# Altium PCB B229.PcbDoc
Units mm, origin at the board's own origin, x right, y up, seen from the top; angles counter-clockwise.
Board outline 22 x 40 mm, 4 copper layers (Top, Layer 1, Layer 2, Bottom), stack 1.564 mm thick; 28 components, 32 nets, 138 pads, 138 vias.
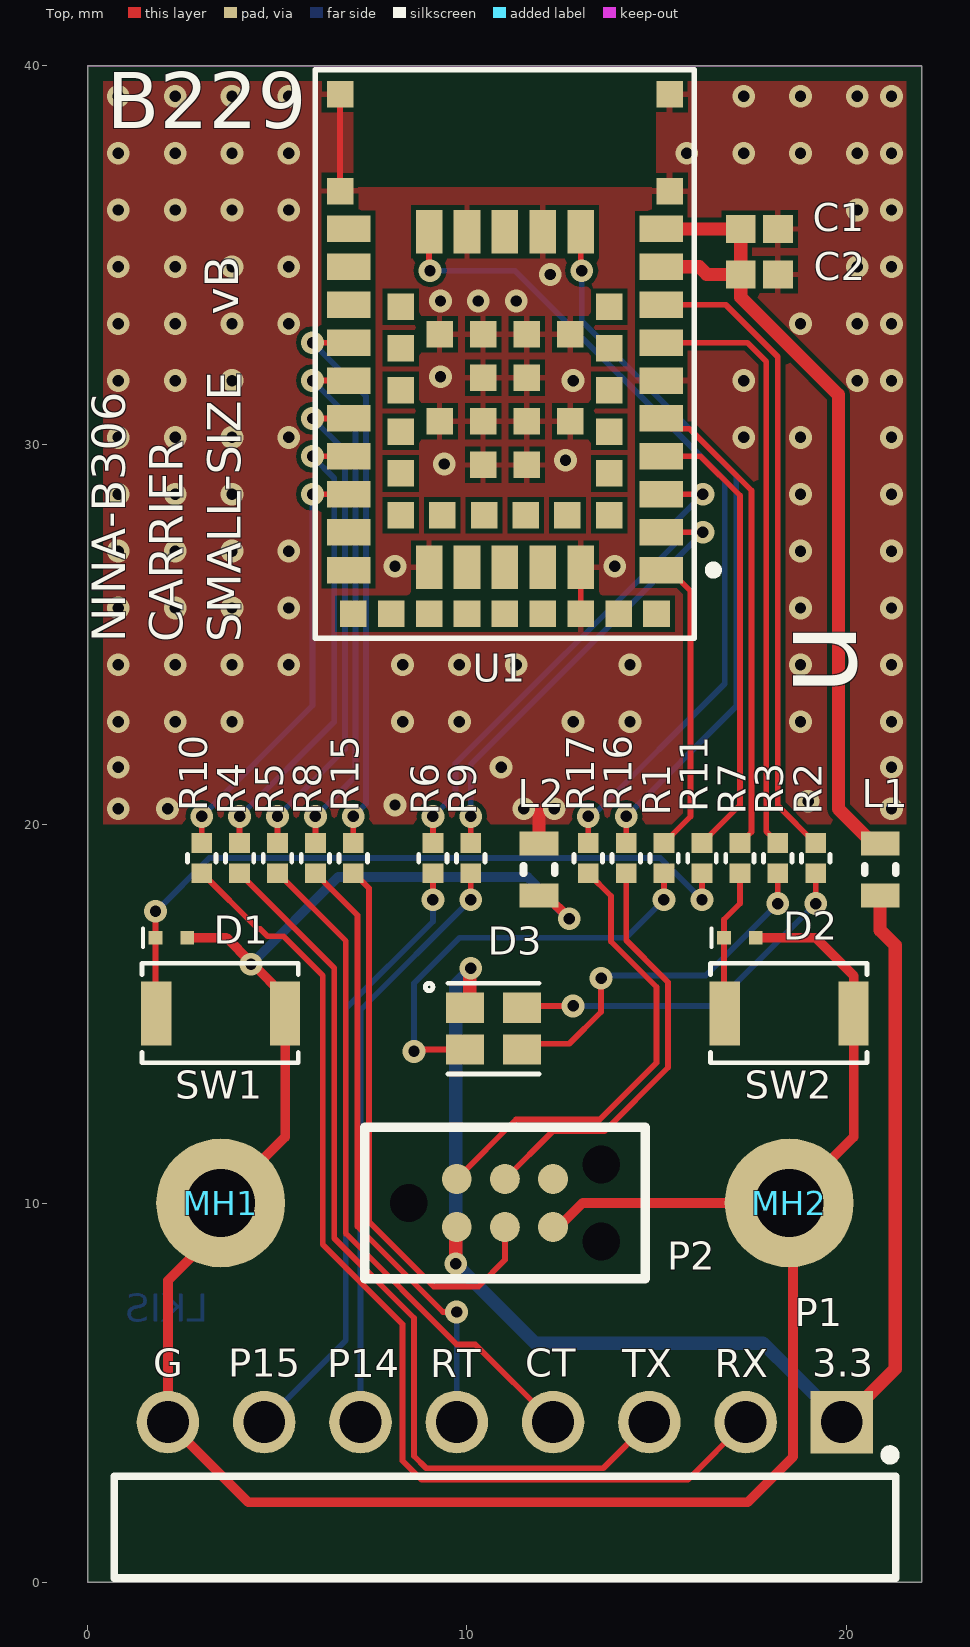
[diagram p0: Top view]
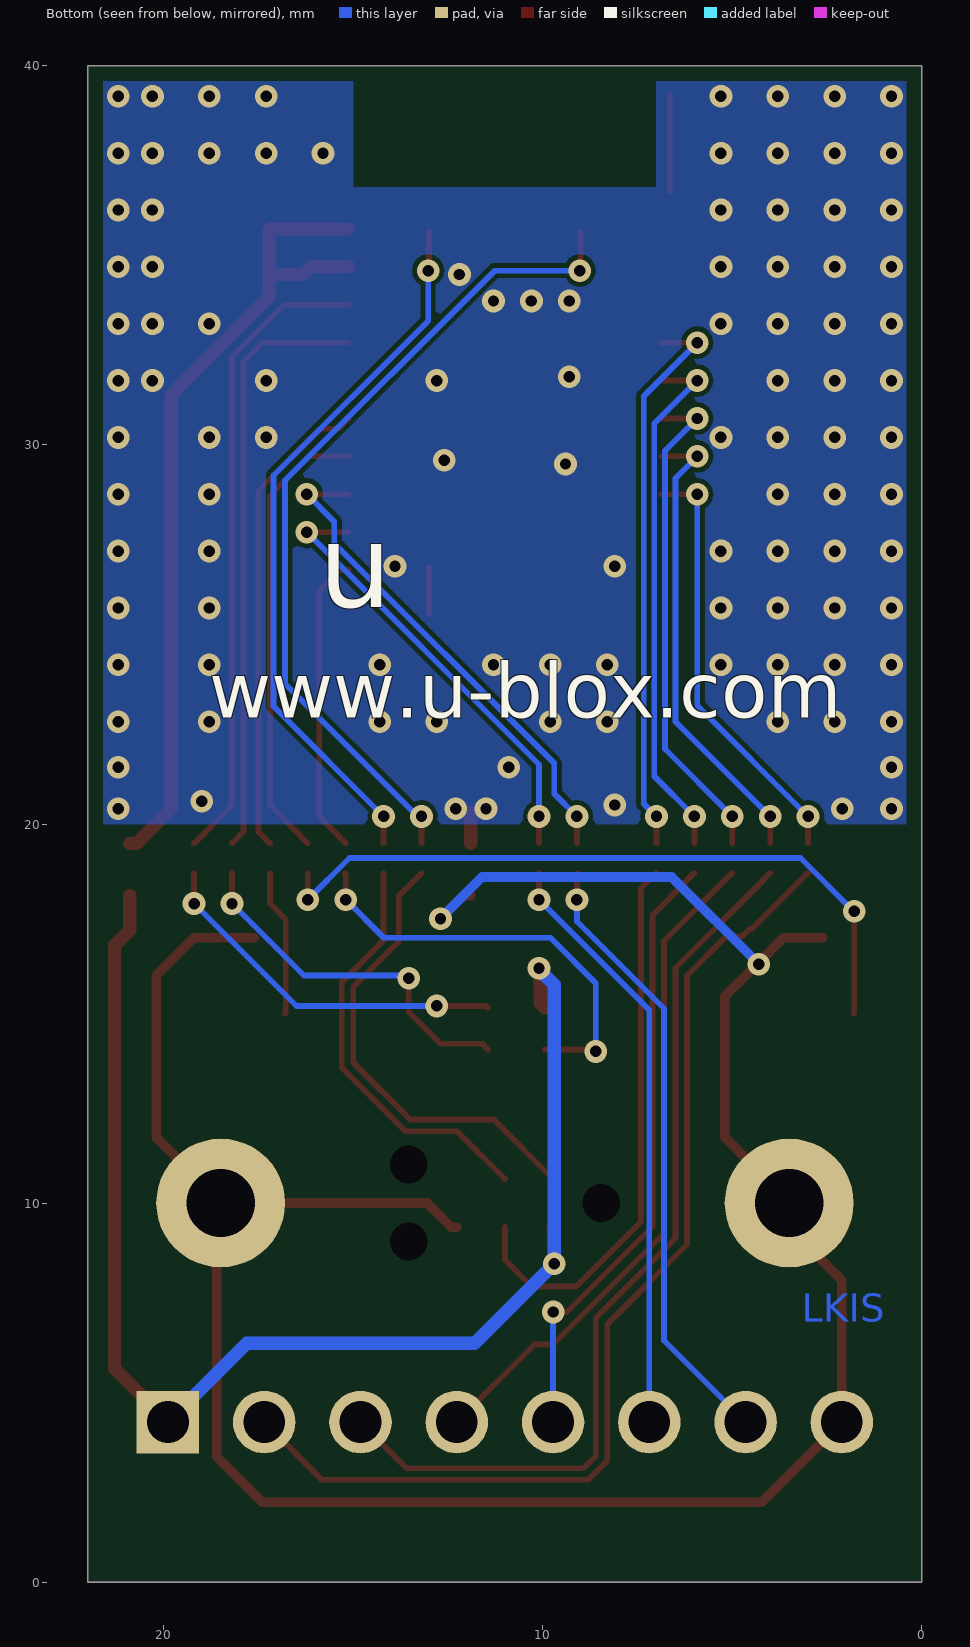
[diagram p1: Bottom view, seen from below]
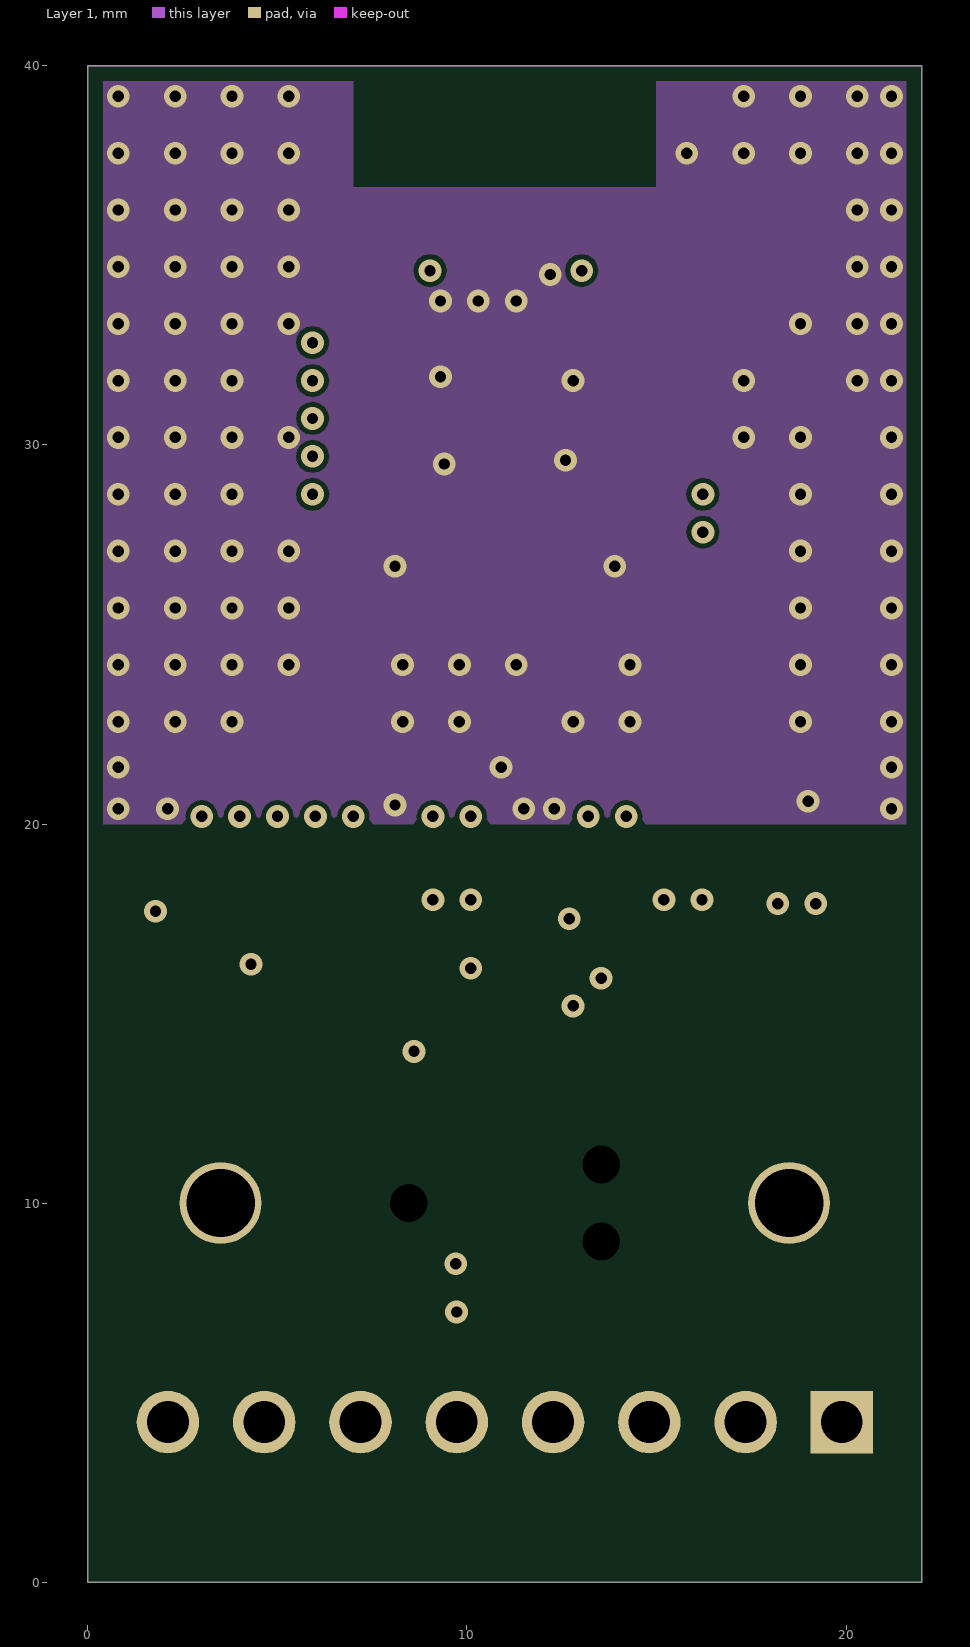
[diagram p2: Layer 1]
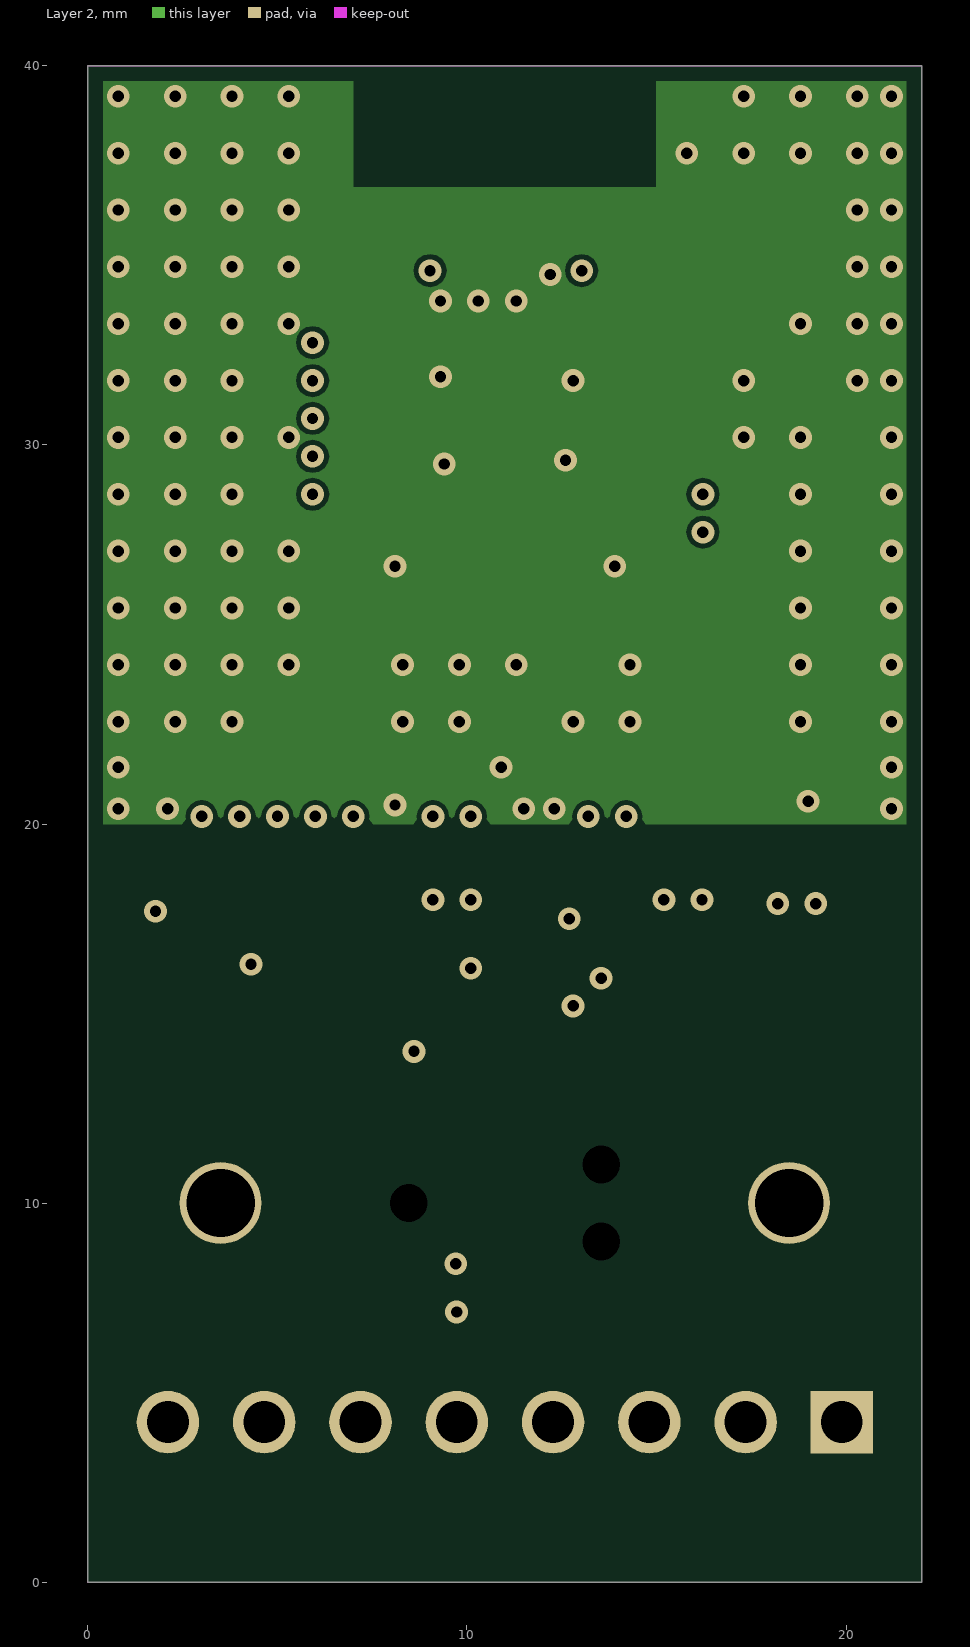
[diagram p3: Layer 2]

## Layer stack, top to bottom
Top Solder: solder mask 0.0203, Solder Resist, Dk 3.5
Top: signal copper 0.0406
Dielectric 1: prepreg 0.0711, PP-006, Dk 4.1
Layer 1: signal copper 0.035
Core: core 1.27, Core-043, Dk 4.3
Layer 2: signal copper 0.035
Dielectric 2: prepreg 0.0711, PP-006, Dk 4.1
Bottom: signal copper 0.0406
Bottom Solder: solder mask 0.0203, Solder Resist, Dk 3.5

## Board outline
0,0 0,40 22,40 22,0

## Design rules (kind name [scope] priority, off if disabled: settings)
BoardOutlineClearance [All] p1: gap=0.4 ignorepadtopadclearanceinfootprint=FALSE
Clearance "Stitching GND" [IsStitchingVia and InNet('GND') vs (IsVia and (Not IsStitchingVia)) Or IsPad] p1: gap=0.127 ignorepadtopadclearanceinfootprint=TRUE
Clearance Clearance_Poly [InPolygon vs OnLayer('Keep-Out Layer') OR (OnLayer('Multi-Layer') AND IsPad  AND Not(PadIsPlated))] p2: gap=0.127 ignorepadtopadclearanceinfootprint=TRUE
Clearance [All] p3: gap=0.127 ignorepadtopadclearanceinfootprint=FALSE except(0: Arc-Text Arc-Hole Track-Text Track-Hole SMDPad-Text SMDPad-Hole THPad-Text THPad-Hole Via-Text Via-Hole Fill-Text Fill-Hole Poly-Text Poly-Hole Region-Text Region-Hole Text-Text Text-Hole)
ComponentClearance [All] p1: gap=0.127 collisioncheckmode=3 verticalgap=0.254 showdistances=FALSE
DiffPairsRouting .14 [All] p1: maxlimit=0.254 minlimit=0.1 mostfreqgap=0.254 toplayer_maxgap=0.1 toplayer_prefgap=0.1 toplayer_minwidth=0.1 toplayer_maxwidth=0.1 toplayer_prefwidth=0.1 midlayer1_mingap=0.254 midlayer1_minwidth=0.381 midlayer1_maxwidth=0.381 midlayer1_prefwidth=0.381 midlayer2_mingap=0.254 midlayer2_minwidth=0.381 midlayer2_maxwidth=0.381 midlayer2_prefwidth=0.381 bottomlayer_maxgap=0.1 bottomlayer_prefgap=0.1 bottomlayer_minwidth=0.1 bottomlayer_maxwidth=0.1 bottomlayer_prefwidth=0.1 maxuncoupledlength=12.7
Height [All] p1: minheight=0 maxheight=25.4 prefheight=2.54
HoleSize [All] p1: absolutevalues=TRUE maxlimit=2540 minlimit=0.127 maxpercent=80.000 minpercent=20.000
HoleToHoleClearance [All] p1: gap=0.152 allowstackedmicrovias=TRUE
MinimumSolderMaskSliver [All] p1: minsoldermaskwidth=0.025
PlaneClearance [InPoly] p1: clearance=0.254
PlaneConnect [All] p1: pad.planeconnectstyle=Relief pad.reliefexpansion=0.508 pad.reliefentries=4 pad.reliefconductorwidth=0.254 pad.reliefairgap=0.254 via.planeconnectstyle=Direct via.reliefexpansion=0.508 via.reliefentries=4 via.reliefconductorwidth=0.254 via.reliefairgap=0.254
PolygonConnect ThermalVias [IsVia] p1: connectstyle=Direct reliefconductorwidth=0.254 reliefentries=4 polygonreliefangle="90 Angle" airgapwidth=0.254
PolygonConnect "PolygonConnect - Power" [InNetClass('')] p2: connectstyle=Relief reliefconductorwidth=0.254 reliefentries=4 polygonreliefangle="90 Angle" airgapwidth=0.127
PolygonConnect PolygonConnect-BGA [InComponentClass('')] p3: connectstyle=Relief reliefconductorwidth=0.152 reliefentries=4 polygonreliefangle="45 Angle" airgapwidth=0.152
PolygonConnect PolygonConnect-General [All] p4: connectstyle=Relief reliefconductorwidth=0.152 reliefentries=4 polygonreliefangle="90 Angle" airgapwidth=0.127
RoutingLayers [All] p1: top layer_v5=TRUE mid layer 1_v5=FALSE mid layer 2_v5=TRUE bottom layer_v5=TRUE
RoutingVias [All] p1: holewidth=0.3 width=0.6 viastyle="Through Hole" minholewidth=0.2 minwidth=0.5 maxholewidth=7 maxwidth=1
SMDEntry [All] p1 off: side=TRUE corner=TRUE anyangle=TRUE
SilkToBoardRegionClearance [All] p1 off:
SilkToSilkClearance [All] p1 off: silktosilkclearance=0.025
SilkToSolderMaskClearance [IsPad] p1 off: minsilkscreentomaskgap=0 clearancetoexposedcopper=TRUE
SolderMaskExpansion SolderMaskExpansion_via [IsVia] p1: expansion=-0.254 istentingtop=TRUE
SolderMaskExpansion [All] p2: expansion=0.05 istentingtop=FALSE
UnRoutedNet [All] p1: checkbadconnections=TRUE
ViasUnderSMD [All] p1: allowed=FALSE
Width [All] p1: maxlimit=2.54 minlimit=0.127 preferedwidth=0.152 toplayer_maxwidth=1 toplayer_prefwidth=0.152 bottomlayer_maxwidth=1 bottomlayer_prefwidth=0.152 minimp=50.000000 maximp=50.000000 favimp=50.000000
Width Width_1 [All] p2: maxlimit=0.254 minlimit=0.254 preferedwidth=0.254
17 further rules are at their usual default settings.

## Components (designator, comment, footprint, x,y, rotation, side; value= is the part's Value field where it differs from the comment)
C1 "Capacitor 0.1 uF +/- 5% 16 V 0402" CAPC1005X56X25ML10T15 17.715,35.7 r180 top value=100nF
C2 "Capacitor 0.1 uF +/- 5% 16 V 0402" CAPC1005X56X25ML10T15 17.715,34.5 r0 top value=100nF
D1 "110-00019" SOD-923 2.2,17 r0 top
D2 "110-00019" SOD-923 17.2,17 r0 top
D3 "115-00011" 4-PLCC 10.7,14.6 r180 top
L1 "LQW18AN22NJ10D" INDC1608X100X30LL20T10 20.9,18.8 r270 top
L2 "LQW18AN22NJ10D" INDC1608X100X30LL20T10 11.9,18.8 r90 top
MH1 "MH_M1.5DNP" MH_M1.5 3.5,10 r0 top
MH2 "MH_M1.5DNP" MH_M1.5 18.5,10 r0 top
P1 "61300811021" 61300811021 11,1.45 r0 top
P2 "TC2030-IDC-NLDNP" TC2030-IDC-NL 8.46,10 r0 top
R1 "180-00031499R" "RES 0402 HD" 15.2,19.1 r270 top value=499R
R2 "180-00098220R" "RES 0402 HD" 18.2,19.1 r270 top value=220R
R3 "180-00098220R" "RES 0402 HD" 19.2,19.1 r270 top value=220R
R4 "180-00098220R" "RES 0402 HD" 4,19.1 r270 top value=220R
R5 "180-00098220R" "RES 0402 HD" 5,19.1 r270 top value=220R
R6 "180-00098220R" "RES 0402 HD" 9.1,19.1 r270 top value=220R
R7 "180-00098220R" "RES 0402 HD" 17.2,19.1 r270 top value=220R
R8 "180-00098220R" "RES 0402 HD" 6,19.1 r270 top value=220R
R9 "180-00098220R" "RES 0402 HD" 10.1,19.1 r270 top value=220R
R10 "180-00098220R" "RES 0402 HD" 3,19.1 r270 top value=220R
R11 "180-00098220R" "RES 0402 HD" 16.2,19.1 r270 top value=220R
R15 "180-00098220R" "RES 0402 HD" 7,19.1 r90 top value=220R
R16 "180-00098220R" "RES 0402 HD" 14.2,19.1 r90 top value=220R
R17 "180-00098220R" "RES 0402 HD" 13.2,19.1 r90 top value=220R
SW1 "135-00007" B3U-1000P 3.5,15 r0 top
SW2 "135-00007" B3U-1000P 18.5,15 r0 top
U1 "NINA-B306" NINA_LGA71R_1500X1000X223_PCB 11,32.4 r90 top

## Footprints (in the part's own frame and the unit in brackets; to place one, negate y for a bottom-side part, rotate by r counter-clockwise, add the part's x,y. Pads: shape width x height; smd on the part's side, far side on the other; paste and mask are expansions set on the pad)
4-PLCC [mm] "4 Pin Plastic Leaded Chip Carrier, 2mm x 2mm"
  rect 1x0.8 smd: 1(0.75,-0.55) 2(-0.75,-0.55) 3(-0.75,0.55) 4(0.75,0.55)
  silkscreen extent -1.2,-1.2 1.8,1.2, body extent -1.05,-1.05 1.05,1.05, height 1.01
61300811021 [mm]
  rect 1.65x1.65 hole 1.1: 1(8.89,2.77)
  round 1.65 hole 1.1: 2(6.35,2.77) 3(3.81,2.77) 4(1.27,2.77) 5(-1.27,2.77) 6(-3.81,2.77) 7(-6.35,2.77) 8(-8.89,2.77)
  silkscreen extent -10.31,-1.35 10.31,2.03, body extent -10.16,-7.27 10.16,3.09, height 2.58
B3U-1000P [mm] "Button Tactile, SMT 4mm x 2.5mm, height 1.2mm"
  rect 0.8x1.7 smd: 1(-1.7,0) 2(1.7,0)
  silkscreen extent -2.07,-1.3 2.05,1.33, body extent -2,-1.25 2,1.25, height 1.6
CAPC1005X56X25ML10T15 [mm] "Chip Capacitor, 2-Leads, Body 1.10x0.60mm, IPC Low Density"
  rect 0.78x0.74 smd: 1(-0.49,0) 2(0.49,0)
  body extent -0.55,-0.3 0.55,0.3, height 0.56
INDC1608X100X30LL20T10 [mm] "Chip Inductor, 2-Leads, Body 1.8x1.1mm, IPC High Density"
  rect 0.64x1.02 smd: 1(-0.685,0) 2(0.685,0)
  silkscreen extent -0.1,-0.41 0.1,0.41, body extent -0.9,-0.55 0.9,0.55, height 1
MH_M1.5 [mm] "Mounting Hole M1.5 Metric, 3.4mm diameter pad"
  round 3.4 / inner round 2.159 / far side round 3.4 hole 1.8: 1(0,0)
NINA_LGA71R_1500X1000X223_PCB [mm] "Stand-alone Bluetooth low energy module"
  rect 0.7x1.15 smd paste+0 mask+0.05: 1(-5.7,-4.125) 2(-4.7,-4.125) 3(-3.7,-4.125) 4(-2.7,-4.125) 5(-1.7,-4.125) 6(-0.7,-4.125) 7(0.3,-4.125) 8(1.3,-4.125) 9(2.3,-4.125) 10(3.3,-4.125) 16(3.3,4.125) 17(2.3,4.125) 18(1.3,4.125) 19(0.3,4.125) 20(-0.7,4.125) 21(-1.7,4.125) 22(-2.7,4.125) 23(-3.7,4.125) 24(-4.7,4.125) 25(-5.7,4.125)
  rect 1.15x0.7 smd paste+0 mask+0.05: 11(3.225,-2) 12(3.225,-1) 13(3.225,0) 14(3.225,1) 15(3.225,2) 26(-5.625,2) 27(-5.625,1) 28(-5.625,0) 29(-5.625,-1) 30(-5.625,-2)
  rect 0.7x0.7 smd paste+0 mask+0.05: 31(-4.25,-2.75) 32(-3.15,-2.75) 33(-2.05,-2.75) 34(-0.95,-2.75) 35(0.15,-2.75) 36(1.25,-2.75) 37(1.25,2.75) 38(0.15,2.75) 39(-0.95,2.75) 40(-2.05,2.75) 41(-3.15,2.75) 42(-4.25,2.75) 43(-4.25,1.65) 44(-4.25,0.55) 45(-4.25,-0.55) 46(-4.25,-1.65) 47(-6.85,4) 48(-6.85,3) 49(-6.85,2) 50(-6.85,1) 51(-6.85,0) 52(-6.85,-1) 53(-6.85,-2) 54(-6.85,-3) 55(-6.85,-4) 56(-2.925,-0.575) 57(-2.925,0.575) 58(-1.775,-1.725) 59(-1.775,-0.575) 60(-1.775,0.575) 61(-1.775,1.725) 62(-0.625,-0.575) 63(-0.625,0.575) 64(0.525,-1.725) 65(0.525,-0.575) 66(0.525,0.575) 67(0.525,1.725) 68(4.3,-4.35) 69(6.85,-4.35) 70(6.85,4.35) 71(4.3,4.35)
  Multi-Layer pour cut-out: 4.4,4 7.5,4 7.5,-4 4.4,-4
  silkscreen extent -7.5,-5.6 7.5,5, body extent -7.5,-5 7.5,5, height 2.31
"RES 0402 HD" [mm] "Chip Resistor, 2-Leads, Body 1.05x0.54mm, IPC High Density"
  rect 0.52x0.55 smd: 1(-0.4,0) 2(0.4,0)
  silkscreen extent -0.1,-0.38 0.1,0.38, body extent -0.55,-0.3 0.55,0.3, height 0.4
SOD-923 [mm] "SOD-923, 2-Leads, Body 1.25x2.50mm, IPC High Density,"
  rect 0.36x0.35 smd mask+0.05: 1(-0.42,0) 2(0.42,0)
  silkscreen extent -0.75,-0.25 -0.75,0.25, body extent -0.4,-0.3 0.4,0.3, height 0.4
TC2030-IDC-NL [mm] "Tag-Connect 6-Pin No Legs"
  round 0.9 hole 0.995 unplated: 0(0,0) 0(5.08,-1.016) 0(5.08,1.016)
  round 0.79 smd paste-0.39: 1(1.27,-0.635) 2(1.27,0.635) 3(2.54,-0.635) 4(2.54,0.635) 5(3.81,-0.635) 6(3.81,0.635)
  silkscreen extent -1.16,-2 6.24,2

## Part data
C1 C2: library part CMP-001-00001-4, "Chip Capacitor, 0.1 uF, +/- 5%, 16 V, 0402 (1005 Metric)", Capacitor Type=Ceramic, Case/Package=0402, Max Operating Temperature=125°C, Min Operating Temperature=-55°C, Tolerance=5%, Voltage Rating=16V, Mounting Technology=SM, Pins=2, RoHS Compliant=True
D1 D2: "Diode, ESD9B, 3.3V, ST5G, SOD-923", Manufacturer="ON Semiconductor", Manufacturer P/N=ESD9B3.3ST5G, MFG Package=SOD-923, Package Type=SOD, Part Name="Diode TVS 3.3V SOD-923", Voltage=3.3V, Arena Link=https://app.bom.com/a/4M5DJQ9Q9SR7DV4H?v=spec.summary, Body Size="0.8mm x 0.6mm", Component Mounting Type=SMT, Diode Type=TVS, Height=0.4mm, Item_Phase=Production, Part Number=110-00019, Part_Type=Diode, Pins=2, Revision=0A, Supplier 1=Arrow, Supplier Part Number 1=ESD9B3.3ST5G, Use in new designs=Yes
D3: "LED, RGB Diffused SMT, PLCC4 4 Pin", Color=RGB, Current="20mA Red, 10mA Green, 10mA, Blue", Manufacturer="Cree, Inc.", Manufacturer P/N=CLMVB-FKA-CFHEHLCBB7a363, MFG Package=PLCC4, Package Type=Custom, Part Name="LED RGB SMT 2mm x 2mm", Supplier Part Number 1=941-CLMVBFKACFHEHLCB, Voltage=5V, Arena Link=https://app.bom.com/a/UCV39GZGZIHY581D?v=spec.summary, Body Size="2.0mm x 2.0mm", Component Mounting Type=SMT, Height=1mm, Item_Phase=Production, Mounting Type=Vertical, Number of Circuits=3, Part Number=115-00011, Part_Type=LED, Pins=4, Revision=0A, Supplier 1=Mouser, Use in new designs=Yes, Vf="2V Red, 3V Green, 3V Blue"
L1 L2: library part CMP-2000-06600-1, "Chip Inductor, 22 nH, +/-5%, 640 mA, -55 to 125 degC, 0603 (1608 Metric), RoHS, Tape and Reel", Current Rating=640mA, DC Resistance (DCR)=99mOhmMax, Frequency - Self Resonant=3.2GHz, Frequency - Test=100MHz, Inductance=22nH, Manufacturer=Murata, Operating Temperature=-55°C~125°C, Package / Case=0603(1608Metric), Package Description="2-Pin Surface Mount Device, Body 1.6 x 0.8 mm", Package Reference=0603, Q @ Freq=42@250MHz, Standard Package=1, Tolerance=±5%, Category=Inductors,Coils,Chokes, Datasheet URL=http://search.murata.co.jp/Ceramy/image/img/PDF/ENG/L0075S0080LQW18A_10.pdf, Datasheet Version=11/2011, Family=FixedInductors, Height - Seated (Max)="0.039\"(1.00mm)", Manufacturer URL=http://www.murata.com/, Material - Core=Non-Magnetic, Mounting Technology=SurfaceMount, Mounting Type=SurfaceMount, Online Catalog=LQWSeries, Other Names=490-6876-1, Packaging=CutTape(CT), Product Training Modules=InductorProductsChipRFInductors, Series=LQW18A_10, Shielding=Unshielded, Size / Dimension="0.063\"Lx0.031\"W(1.60mmx0.80mm)", Type=Wirewound
MH1 MH2: library part MH_M1.5, "1.5M screw mounting hole, plated", Added By="Jeremy D", Added Date=7/9/2015, DNP=DNP, Height=0mm, Part Number=MH_M1.5, Size="3.4mm x 3.4mm", Type="Mounting Hole"
P1: library part CMP-1502-01075-1, "THT Angled Pin Header WR-PHD, Pitch 2.54 mm, Single Row, 8 pins", Contact Resistance=20mOhm, Manufacturer="Wurth Elektronik", Operating Temperature=-40to105degC, Rated Current=3A, Withstanding Voltage=500VAC, Working Voltage=250VAC, Datasheet URL=https://katalog.we-online.de/em/datasheet/6130xx11021.pdf, Gender=Male, Manufacturer Part Number=61300811021, Manufacturer URL=http://www.we-online.de, Mounting Technology=THT, Orientation=Angled, Package Reference=61300811021, Packaging=Bag, Part Number=61300811021, Pin Number=8, Pitch=2.54mm, Publisher=WurthElektronik, Row Number=Single
P2: library part TC2030-IDC-NL, "CON PADS FOR CBL PLUG-OF-NAILS 6-PIN NO LEGS", Manufacturer="TAG Connect", Added By="Paul B", Added Date=4/22/2015, DNP=DNP, Height=0, Manufacturer P/N=TC2030-IDC-NL, Part Number=TC2030-IDC-NL, Size="6.731mm x 12.446mm"
R1: library part 180-00031, "Resistor, 499ohm, 1%, 1/16W, 0402", Manufacturer="Rohm Semiconductor", Manufacturer 2="Samsung Electro-Mechanics America, Inc", Manufacturer P/N=MCR01MRTF4990, Manufacturer P/N 2=RC1005F4990CS, Part Name="RES SMD 499 OHM 1% 1/16W 0402", Power=1/16W, Supplier Part Number 1=RHM499CDCT-ND, Tolerance="+/- 1%", Alternate Footprint Ref="RES 0402", Arena Link=https://app.bom.com/a/Q8RZ5CVCVEDU1SS5?v=spec.summary, Component Mounting Type=SMT, Height=0.4mm, Item_Phase=Production, Part Number=180-00031, Part_Type=Resistor, Pins=2, Revision=0D, Size=0402, Supplier 1=Digi-Key, Supplier 2=Digi-Key, Supplier Part Number 2=1276-3992-1-ND, Use in new designs=Yes
R2 R3: library part 180-00098, "Resistor, 220ohm, 5%, 1/16W, 0402.", Manufacturer="Panasonic Electronic Components", Manufacturer 2="Samsung Electro-Mechanics America, Inc", Manufacturer P/N=ERJ-2GEJ221X, Manufacturer P/N 2=RC1005J221CS, Part Name="RES SMD 220 OHM 5% 1/16W 0402", Power=1/16W, Supplier Part Number 1=P220JCT-ND, Tolerance="+/- 5%", Alternate Footprint Ref="RES 0402", Arena Link=https://app.bom.com/a/8Q9HNUDUDWVBJC30?v=spec.summary, Component Mounting Type=SMT, Height=0.4mm, Item_Phase=Production, Part Number=180-00098, Part_Type=Resistor, Pins=2, Revision=0C, Size=0402, Supplier 1=Digi-Key, Supplier 2=Digi-Key, Supplier Part Number 2=1276-4360-1-ND, Use in new designs=Yes
R4 R5 R6 R7 R8 R9 R10 R11 R15 R16 R17: library part 180-00098, "Resistor, 220ohm, 5%, 1/16W, 0402.", Manufacturer 1="Samsung Electro-Mechanics America, Inc", Manufacturer 2="Panasonic Electronic Components", Manufacturer Part Number 1=RC1005J221CS, Manufacturer Part Number 2=ERJ-2GEJ221X, Max Operating Temp=155, Min Operating Temp=-55, Part Name="RES SMD 220 OHM 5% 1/16W 0402", Power=1/16W, Supplier Part Number 1=1276-4360-1-ND, Tolerance="+/- 5%", Voltage=None, Height=0.4mm, Item Phase="In Production", Part Number=180-00098, Pins=2, Revision=0C, Size=0402, Supplier 1=Digi-Key, Supplier 2=Digi-Key, Supplier Part Number 2=P220JCT-ND, UBX Code=None, Use in new designs=Yes
SW1 SW2: "Button, Momentary SPST-NO, 0.05A, 12V, 3mm x 2.5mm", Current=50mA, Manufacturer="Omron Electronics Inc-EMC Div", Manufacturer P/N=B3U-1000P, Part Name="SWITCH TACTILE SPST-NO 0.05A 12V", Supplier Part Number 1=SW1020CT-ND, Voltage=12VDC, Arena Link=https://app.bom.com/a/TBU28FYFYHGV5FQ0?v=spec.summary, Body Size="3mm x 2.5mm", Component Mounting Type=SMT, Height=1.2mm, Item_Phase=Production, Part Number=135-00007, Part_Type=Button, Pins=2, Revision=0A, Supplier 1=Digi-Key, Switch/Button Circuit=SPST, Switch/Button Function=Off-Mom, Use in new designs=Yes
U1: "Stand-alone Bluetooth low energy module", Manufacturer=u-blox, Part Description="Stand-alone Bluetooth low energy module"

## Via types
v1: diameter 0.6, hole 0.3, Top to Bottom, tented both sides, 138 vias

## Nets (pads, with @x,y where several pads share a name; then routed paths per layer and width w, separated by ;. In a path a pad name is that pad's centre, name@x,y a point inside that pad or via, vN(x,y) a via of type N, cw(c..) or ccw(c..) an arc to the next point about the centre after c; other vN are vias at no path point)
3V3: D3.1 L1.2 P1.1 P2.1 | length 36.6
  Top w0.35: v1(9.7,8.4) 9.7,9.335 P2.1 ; D3.1 10.07,15.27 10.07,16.167 v1(10.1,16.197) ; P1.1 21.3,5.63 21.3,16.8 20.9,17.2 L1.2
  Bottom w0.35: v1(10.1,16.197) 10.1,16.157 9.7,15.757 v1(9.7,8.4) 11.8,6.3 17.81,6.3 18.62,5.49 P1.1
3V3_M: C1.2 C2.1 L1.1 U1.9 U1.10 | length 22.1
  Top w0.35: U1.9 16.125,34.7 16.325,34.5 C2.1 ; U1.10 C1.2 C2.1 ; L1.1 20.71,19.485 20.565,19.63 20.565,19.635 19.8,20.4 19.8,31.325 17.225,33.9 C2.1
B_M: R3.1 U1.8 | length 16.9
  Top w0.152: U1.8 16.83,33.7 18.2,32.33 18.2,20.485 19.185,19.5 R3.1
BLUE: D3.2 R3.2 | length 9.7
  Top w0.152: D3.2 11.5,15.2 v1(12.8,15.2) ; v1(19.2,17.9) R3.2
  Bottom w0.152: v1(12.8,15.2) 16.5,15.2 v1(19.2,17.9)
BT1_M: R11.1 U1.4 | length 12.1
  Top w0.152: U1.4 16.17,29.7 17.2,28.67 17.2,20.5 16.399,19.699 16.399,19.684 16.215,19.5 R11.1
BT2_M: R7.1 U1.5 | length 12.6
  Top w0.152: U1.5 15.399,30.426 15.874,30.426 17.504,28.796 17.504,19.789 17.215,19.5 R7.1
BUTTON1: D1.1 R11.2 SW1.1 | length 18.9
  Top w0.152: v1(1.78,17.7) D1.1 1.78,15.02 SW1.1 ; v1(16.2,18) R11.2
  Bottom w0.152: v1(1.78,17.7) 1.8,17.7 3.2,19.1 15.1,19.1 v1(16.2,18)
BUTTON2: D2.1 R7.2 SW2.1 | length 3.9
  Top w0.152: SW2.1 16.78,15.02 D2.1 16.78,17.48 17.2,17.9 R7.2
CTS: P1.4 R5.2 | length 17.8
  Top w0.152: R5.2 5.015,18.7 6.804,16.911 6.804,9.196 9.73,6.27 10.22,6.27 P1.4
CTS_M: R5.1 U1.21 | length 13.2
  Top w0.152: R5.1 v1(5,20.2) ; v1(5.925,30.7) U1.21
  Bottom w0.152: v1(5,20.2) 6.779,21.979 6.779,29.846 v1(5.925,30.7)
G_M: R2.1 U1.7 | length 15.8
  Top w0.152: U1.7 17.4,32.7 17.896,32.204 17.896,19.804 18.001,19.699 18.001,19.684 18.185,19.5 R2.1
GND: D1.2 D2.2 L2.1 MH1.1 MH2.1 P1.8 P2.5 SW1.2 SW2.2 | length 67.4
  Top w0.254: D1.2 3.65,17 4.3,16.35 v1(4.3,16.3) 4.35,16.3 5.2,15.45 SW1.2 5.2,11.736 3.5,10.036 MH1.1 3.5,9.344 2.11,7.954 P1.8 4.23,2.1 17.4,2.1 18.6,3.3 18.6,9.9 MH2.1 ; L2.1 12.09,18.115 12.7,17.505 v1(12.7,17.503) ; P2.5 12.415,9.365 13.05,10 MH2.1 ; D2.2 19.2,17 20.2,16 SW2.2 20.2,11.736 18.5,10.036 MH2.1
  Bottom w0.254: v1(4.3,16.3) 6.6,18.6 11.6,18.6 12.697,17.503 v1(12.7,17.503)
GND_M: C1.1 C2.2 L2.2 U1.6 U1.12 U1.14 U1.26 U1.30 U1.53 U1.56 U1.57 U1.58 U1.59 U1.60 U1.61 U1.62 U1.63 U1.64 U1.65 U1.66 U1.67 U1.68 U1.69 U1.70 U1.71 | length 4.6
  Top w0.152: U1.71 U1.70 ; U1.53 U1.30
  Top w0.35: L2.2 11.9,20.3
  other v1: 0.8,20.4 2.1,20.4 11.5,20.4 12.3,20.4 21.2,20.4 8.1,20.5 19,20.6 0.8,21.5 10.9,21.5 21.2,21.5 0.8,22.7 2.3,22.7 3.8,22.7 8.3,22.7 9.8,22.7 12.8,22.7 14.3,22.7 18.8,22.7 21.2,22.7 0.8,24.2 2.3,24.2 3.8,24.2 5.3,24.2 8.3,24.2 9.8,24.2 11.3,24.2 14.3,24.2 18.8,24.2 21.2,24.2 0.8,25.7 2.3,25.7 3.8,25.7 5.3,25.7 18.8,25.7 21.2,25.7 8.1,26.8 13.9,26.8 0.8,27.2 2.3,27.2 3.8,27.2 5.3,27.2 18.8,27.2 21.2,27.2 0.8,28.7 2.3,28.7 3.8,28.7 18.8,28.7 21.2,28.7 9.4,29.5 12.6,29.6 0.8,30.2 2.3,30.2 3.8,30.2 5.3,30.2 17.3,30.2 18.8,30.2 21.2,30.2 0.8,31.7 2.3,31.7 3.8,31.7 12.8,31.7 17.3,31.7 20.3,31.7 21.2,31.7 9.3,31.8 0.8,33.2 2.3,33.2 3.8,33.2 5.3,33.2 18.8,33.2 20.3,33.2 21.2,33.2 9.3,33.8 10.3,33.8 11.3,33.8 12.2,34.5 0.8,34.7 2.3,34.7 3.8,34.7 5.3,34.7 20.3,34.7 21.2,34.7 0.8,36.2 2.3,36.2 3.8,36.2 5.3,36.2 20.3,36.2 21.2,36.2 0.8,37.7 2.3,37.7 3.8,37.7 5.3,37.7 15.8,37.7 17.3,37.7 18.8,37.7 20.3,37.7 21.2,37.7 0.8,39.2 2.3,39.2 3.8,39.2 5.3,39.2 17.3,39.2 18.8,39.2 20.3,39.2 21.2,39.2
GREEN: D3.3 R2.2 | length 9.8
  Top w0.152: D3.3 11.6,14.2 12.7,14.2 13.538,15.038 v1(13.538,15.933) ; v1(18.2,17.9) R2.2
  Bottom w0.152: v1(13.538,15.933) 13.538,15.962 13.5,16 16.3,16 v1(18.2,17.9)
nRESET: P2.3 R15.1 | length 14.8
  Top w0.152: R15.1 7.015,18.7 7.412,18.303 7.412,9.508 9.12,7.8 10.3,7.8 11,8.5 P2.3
nRST_M: R15.2 U1.19 | length 14.9
  Top w0.152: v1(5.925,32.7) U1.19 ; R15.2 v1(7,20.2)
  Bottom w0.152: v1(5.925,32.7) 7.337,31.288 7.337,20.537 v1(7,20.2)
P0.14: P1.6 R9.2 | length 15.7
  Top w0.152: v1(10.1,18) R9.2
  Bottom w0.152: P1.6 7.19,15.09 v1(10.1,18)
P0.14_M: R9.1 U1.2 | length 11.8
  Top w0.152: R9.1 v1(10.1,20.2) ; U1.2 v1(16.225,27.7)
  Bottom w0.152: v1(10.1,20.2) 10.1,21.57 16.225,27.695 v1(16.225,27.7)
P0.15: P1.7 R6.2 | length 16.3
  Top w0.152: v1(9.1,18) R6.2
  Bottom w0.152: P1.7 6.8,6.37 6.8,15.13 9.1,17.43 v1(9.1,18)
P0.15_M: R6.1 U1.3 | length 13.3
  Top w0.152: R6.1 v1(9.1,20.2) ; U1.3 v1(16.225,28.7)
  Bottom w0.152: v1(9.1,20.2) 9.7,20.8 9.7,21.6 15.5,27.4 15.5,27.975 v1(16.225,28.7)
R_M: R1.1 U1.1 | length 8
  Top w0.152: U1.1 15.35,26.7 15.9,26.15 15.9,20.2 15.399,19.699 15.399,19.684 15.215,19.5 R1.1
RED: D3.4 R1.2 | length 11.4
  Top w0.152: v1(8.6,14) 8.65,14.05 D3.4 ; v1(15.196,18.002) 15.199,18 15.2,18 R1.2 R1.2@15.225,18.675
  Bottom w0.152: v1(8.6,14) 8.6,15.8 9.8,17 14.194,17 v1(15.196,18.002)
RTS: P1.5 R8.2 | length 16.2
  Top w0.152: R8.2 6.015,18.7 6.199,18.516 6.199,18.501 7.108,17.592 7.108,9.382 9.365,7.125 v1(9.725,7.125)
  Bottom w0.152: v1(9.725,7.125) 9.728,7.122 9.728,4.222 P1.5
RTS_M: R8.1 U1.20 | length 14.1
  Top w0.152: v1(5.925,31.7) U1.20 ; R8.1 v1(6,20.2)
  Bottom w0.152: v1(5.925,31.7) 7.058,30.567 7.058,21.258 v1(6,20.2)
RXD: P1.2 R10.2 | length 27.9
  Top w0.152: R10.2 3.015,18.7 4.485,17.23 4.542,17.23 4.736,17.036 5.16,17.036 6.196,16 6.196,8.904 8.3,6.8 8.3,3.2 8.8,2.7 15.83,2.7 P1.2
RXD_M: R10.1 U1.23 | length 11.4
  Top w0.152: R10.1 v1(3,20.2) ; v1(5.925,28.7) U1.23
  Bottom w0.152: v1(3,20.2) 5.925,23.125 v1(5.925,28.7)
SWCLK: P2.4 R16.1 | length 11.1
  Top w0.152: P2.4 12.261,11.896 13.026,11.896 13.626,11.896 15.304,13.574 15.304,14.174 15.304,15.826 15.2,15.93 14.2,16.93 R16.1
SWCLK_M: R16.2 U1.11 | length 19
  Top w0.152: U1.11 13,34.625 v1(13.025,34.6) ; R16.2 v1(14.2,20.2)
  Bottom w0.152: v1(13.025,34.6) 13.025,33.275 17.104,29.196 17.104,23.104 v1(14.2,20.2)
SWDIO: P2.2 R17.1 | length 12.3
  Top w0.152: P2.2 11.295,12.2 13.5,12.2 15,13.7 15,15.7 13.8,16.9 13.8,18.1 R17.1
SWDIO_M: R17.2 U1.15 | length 22.2
  Top w0.152: U1.15 9,34.625 v1(9.025,34.6) ; R17.2 v1(13.2,20.2)
  Bottom w0.152: v1(9.025,34.6) 11.27,34.6 16.8,29.07 16.8,23.7 13.3,20.2 v1(13.2,20.2)
TXD: P1.3 R4.2 | length 24.1
  Top w0.152: R4.2 4.015,18.7 4.199,18.516 4.199,18.501 6.5,16.2 6.5,9.07 8.604,6.966 8.604,3.326 8.926,3.004 13.594,3.004 P1.3
TXD_M: R4.1 U1.22 | length 12.4
  Top w0.152: R4.1 v1(4,20.2) ; v1(5.925,29.7) U1.22
  Bottom w0.152: v1(4,20.2) 6.5,22.7 6.5,29.125 v1(5.925,29.7)
pads on no net: P2.0 P2.6 U1.13 U1.16 U1.17 U1.18 U1.24 U1.25 U1.27 U1.28 U1.29 U1.31 U1.32 U1.33 U1.34 U1.35 U1.36 U1.37 U1.38 U1.39 U1.40 U1.41 U1.42 U1.43 U1.44 U1.45 U1.46 U1.47 U1.48 U1.49 U1.50 U1.51 U1.52 U1.54 U1.55

## Polygon pours and split planes (outlines as drawn)
GND_M on Top "NONET_L01_P-001" (solid, remove dead copper, pour order 13): 22,20 0,20 0,40 22,40
GND_M on Layer 2 "NONET_L01_P-001" (solid, pour order 11): 22,20 0,20 0,40 22,40
GND_M on Bottom "NONET_L01_P-001" (solid, remove dead copper, pour order 12): 22,20 0,20 0,40 22,40
GND_M on Layer 1 "NONET_L01_P-001" (solid, pour order 14): 22,20 0,20 0,40 22,40

## Keep-outs
Keep-Out Layer:
  the board outline again, w0.025

## Other copper
Top:
  pour cut-out: 9.711,9.768 9.711,10.293 10.086,10.668 11.911,10.668 12.261,10.318 12.261,9.743 11.916,9.398 10.081,9.398 10.011,9.468
Bottom:
  pour cut-out: 0.7,6.4 0.7,7.45 3.325,7.45 3.325,6.4
  text "LKIS" at 3.17,6.613 h1.27

## Silkscreen, mask and mechanical layers (free items; w line width, h text height)
Top Overlay:
  text "B229" at 0.5,37.87 h2.54
  text "vB" at 4.255,33.433 h1.52 r90
  text "NINA-B306 / CARRIER / SMALL-SIZE" at 4.316,24.801 h1.52 r90
  text "u" at 20.996,23.389 h3.81 r90
  text "G" at 1.724,5.163 h1.27
  text "P15" at 3.702,5.163 h1.27
  text "CT" at 11.534,5.163 h1.27
  text "3.3" at 19.111,5.165 h1.27
  text "P14" at 6.307,5.15 h1.27
  text "RT" at 9.025,5.15 h1.27
  text "TX" at 14.092,5.15 h1.27
  text "RX" at 16.535,5.15 h1.27
Bottom Overlay:
  text "u" at 15.913,24.994 h3.81
  text "www.u-blox.com" at 18.796,22.31 h2.5
Route Tool Path:
  the board outline again, w0.127